# Altium PCB PCB1.PcbDoc
Units mil, origin at the board's own origin, x right, y up, seen from the top; angles counter-clockwise.
Board outline 2800 x 4400 mil, 2 copper layers (Top Layer, Bottom Layer); 74 components, 69 nets, 258 pads, 0 vias.
Unrouted connection lines stored in the file: 176.
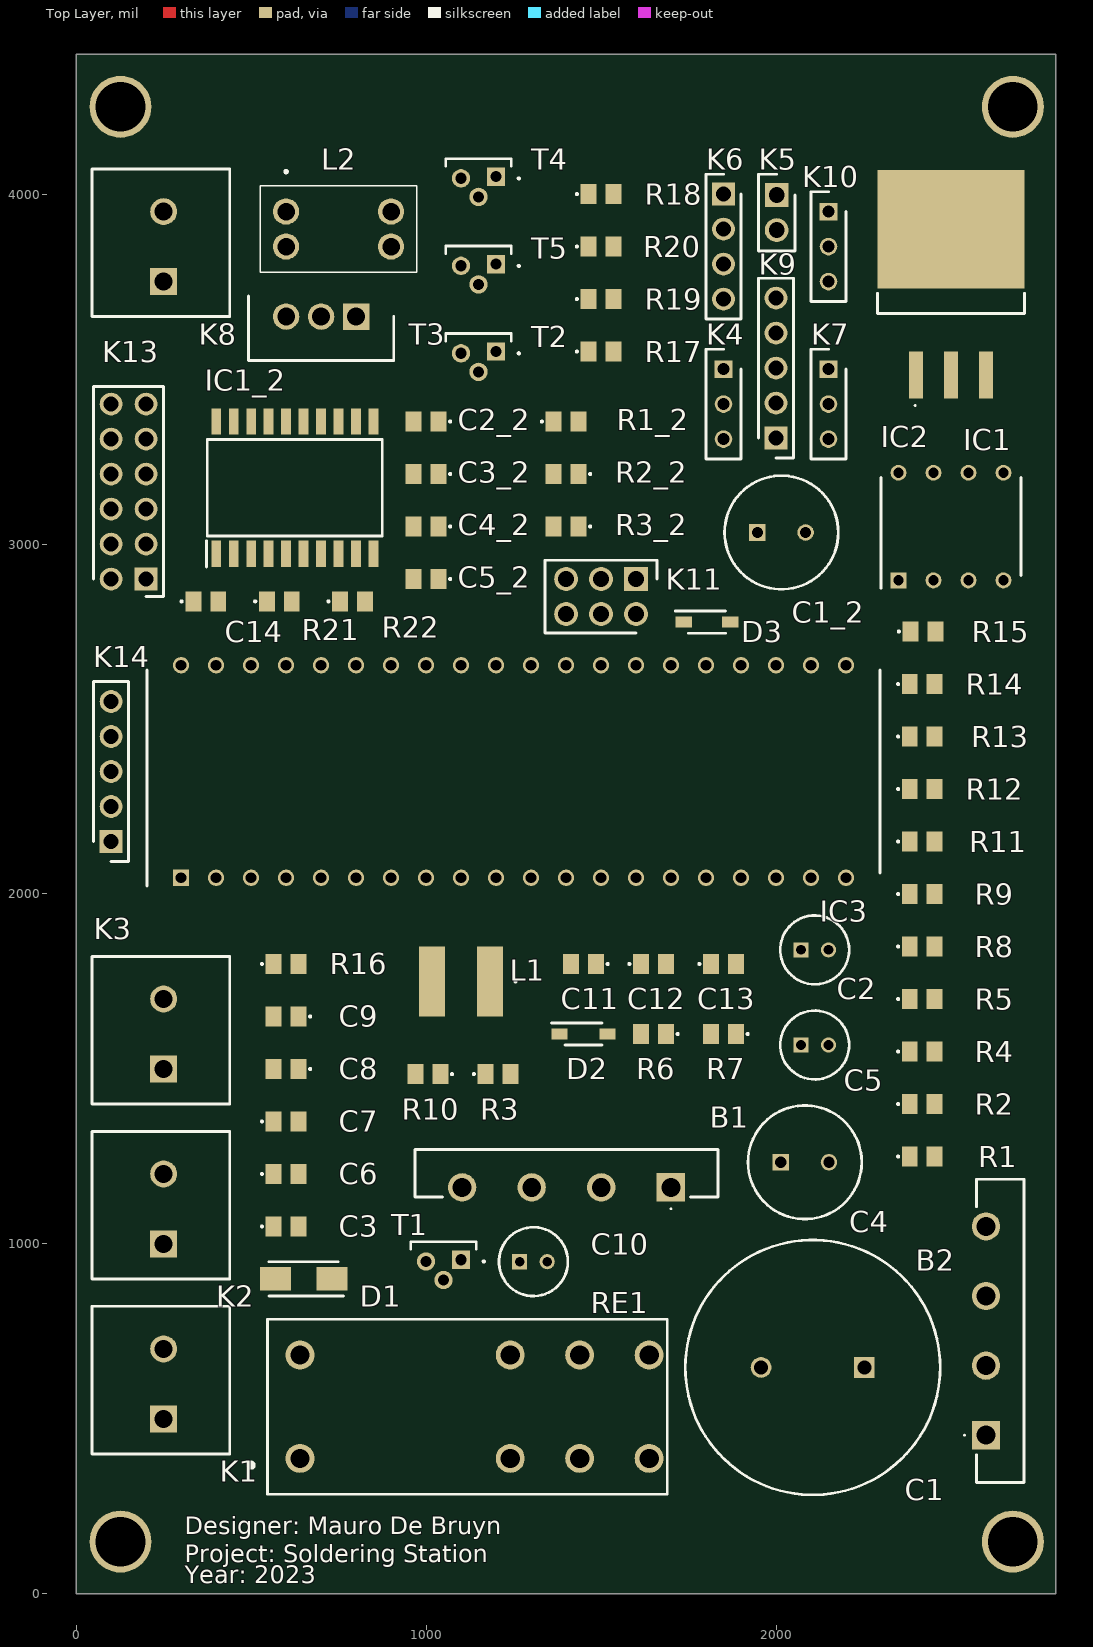
[diagram p0: Top Layer view]
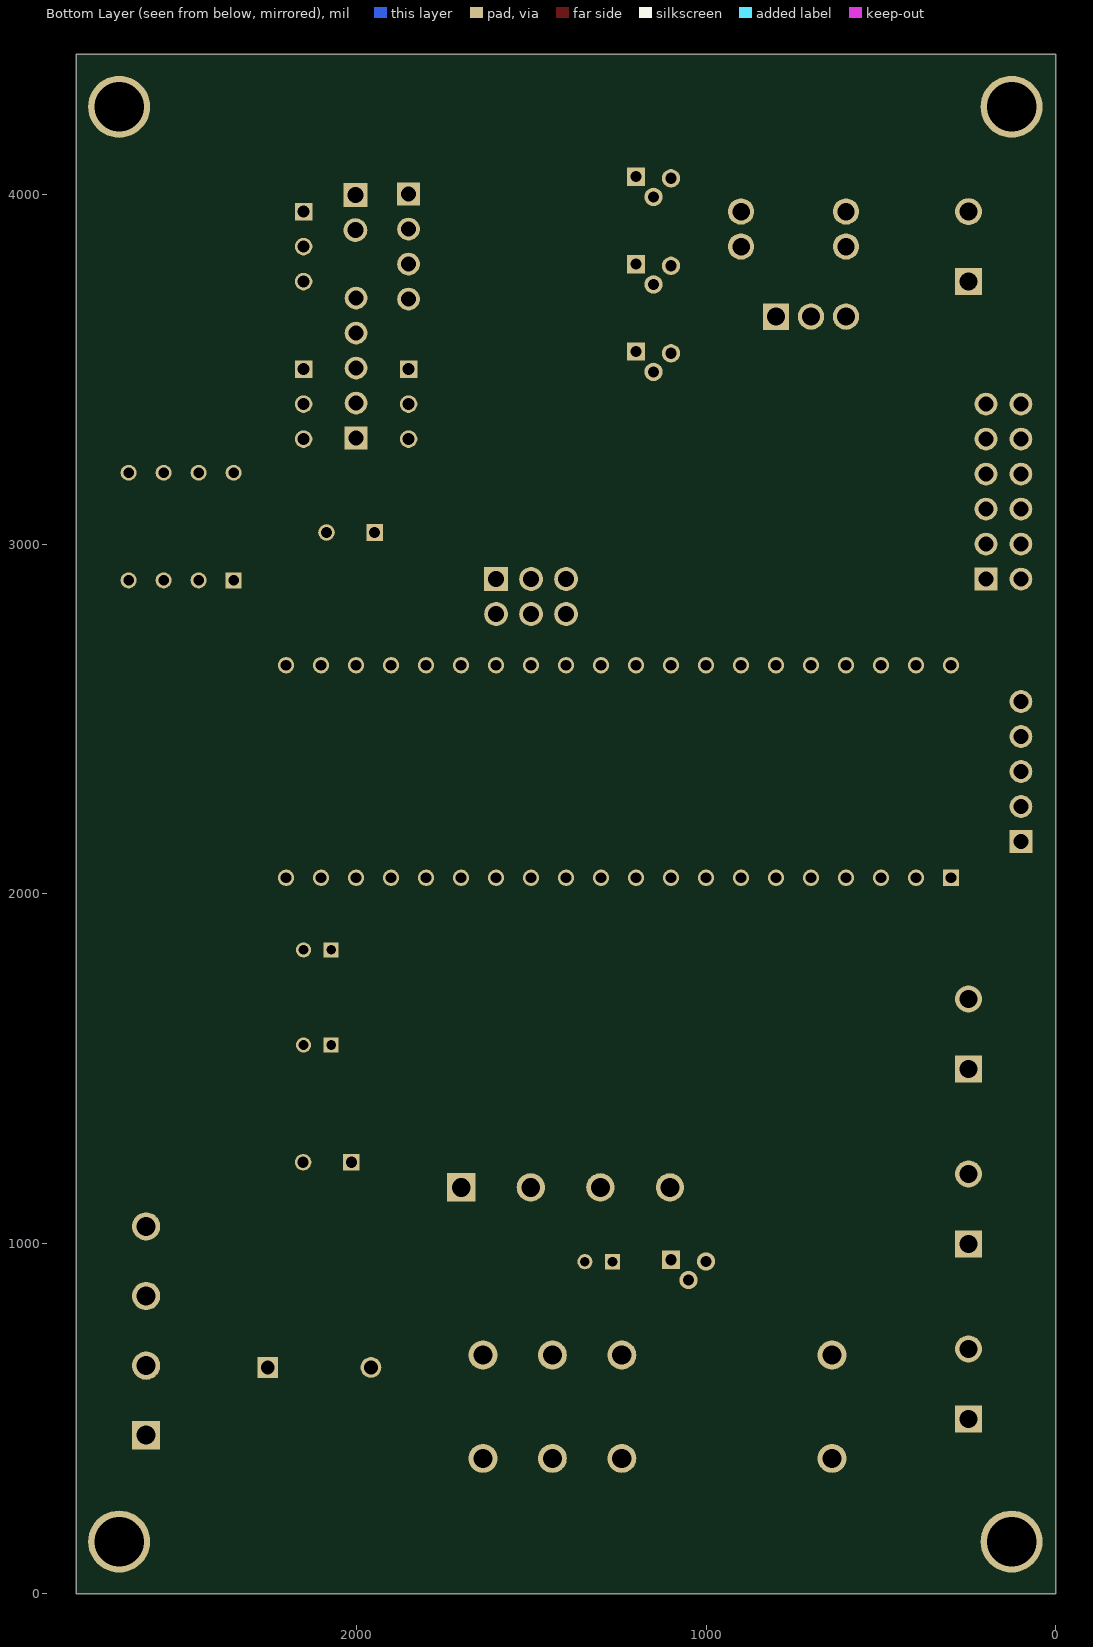
[diagram p1: Bottom Layer view, seen from below]

## Layer stack, top to bottom
Top Solder: solder mask 0.4, Solder Resist, Dk 3.5
Top Layer: signal copper 1.4
Dielectric 1: dielectric 12.6, FR-4, Dk 4.8
Bottom Layer: signal copper 1.4
Bottom Solder: solder mask 0.4, Solder Resist, Dk 3.5

## Board outline
0,4400 0,0 2800,0 2800,4400

## Design rules (kind name [scope] priority, off if disabled: settings)
Clearance [All] p1: gap=10 ignorepadtopadclearanceinfootprint=FALSE except(0: Arc-Hole Track-Hole SMDPad-Hole THPad-Hole Via-Hole Fill-Hole Poly-Hole Region-Hole Text-Hole)
PolygonConnect [All] p1: connectstyle=Relief reliefconductorwidth=10 reliefentries=4 polygonreliefangle="90 Angle" airgapwidth=10
RoutingVias [All] p1: holewidth=28 width=50 viastyle="Through Hole" minholewidth=28 minwidth=50 maxholewidth=28 maxwidth=50
SolderMaskExpansion [All] p1: expansion=4 istentingtop=FALSE
Width [All] p1: maxlimit=10 minlimit=10 preferedwidth=10
30 further rules are at their usual default settings.

## Classes and differential pairs
component class Transistor: K8 L2 R17 R18 R19 R20 T2 T3 T4 T5
component class "Soldering Tip (Opam)": C2 C3 C6 C7 C12 C13 IC2 K3 R1 R2 R4 R5 R8 R9 R11 R12 R13 R14 R15
component class "Power (Bridge Rectifier)": B1 B2 C1 C4 C5 D1 D2 IC1 K1 K2 R3 R6 R7 R10 RE1 T1
component class Display: C1_2 C2_2 C3_2 C4_2 C5_2 IC1_2 K13 K14 R1_2 R2_2 R3_2
component class CPU: C8 C9 C10 C11 C14 D3 IC3 K4 K5 K6 K7 K9 K10 K11 L1 R16 R21 R22

## Components (designator, comment, footprint, x,y, rotation, side; value= is the part's Value field where it differs from the comment)
B1 "GBU606-G" GBU606G 1699.5,1161.62 r0 top
B2 "GBU606-G" GBU606G 2600,453.54 r270 top
C1 "4700µF" CAPPRD750W80D1850H4150 2252.61,647.14 r180 top
C1_2 "100µF" CAPPRD350W60D825H1300 1946.68,3032.99 r0 top
C2 "10µF" CAPPRD200W52D500H1250 2071.26,1840.38 r0 top
C2_2 "100n" 0805 1000,3350 r180 top
C3 "100n" 0805 600,1050 r0 top
C3_2 "10n" 0805 1000,3200 r180 top
C4 "100µF" CAPPRD350W60D825H1300 2013.58,1233.43 r0 top
C4_2 "10n" 0805 1000,3050 r180 top
C5 "10µF" CAPPRD200W52D500H1250 2071.26,1568.43 r0 top
C5_2 "10n" 0805 1000,2900 r180 top
C6 "10n" 0805 600,1200 r0 top
C7 "10n" 0805 600,1350 r0 top
C8 "100n" 0805 600,1500 r180 top
C9 "100n" 0805 600,1650 r180 top
C10 "10µF" CAPPRD200W52D500H1250 1267.42,949.29 r0 top
C11 "100n" 0805 1450,1800 r180 top
C12 "10n" 0805 1650,1800 r0 top
C13 "10n" 0805 1850,1800 r0 top
C14 "100n" 0805 370.58,2836.32 r0 top
D1 "FM4007W-W" DIOM5025X231N 650,900 r180 top
D2 "SZMMSZ5231BT1G" SOD3716X135N 1450,1600 r0 top
D3 "MMSD4448" SOD3816X128N 1802.68,2776.86 r0 top
IC1 "TL780-05CKTTR" TL78005CKTTR 2500,3748.23 r0 top
IC1_2 "TM1637" tm1637 625,3161.02 r90 top
IC2 "MCP6002-E_P" DIP781W56P254L950H533Q8N 2500,3050 r90 top
IC3 "ATMEGA4809-PF" DIP1543W58P254L5175H635Q40N 1250,2350 r90 top
K1 "2 Pin Connector 1716020000" 1716020000 250,500 r90 top
K2 "2 Pin Connector 1716020000" 1716020000 250,1000 r90 top
K3 "2 Pin Connector 1716020000" 1716020000 250,1500 r90 top
K4 "M20-9990345" HDRV3W64P0X254_1X3_762X254X864P 1850,3500 r270 top
K5 "M20-9990246" HDRV2W66P0X254_1X2_508X254X874P 2001.97,3997.05 r270 top
K6 "UART2" HDRV4W64P0X254_1X4_1016X254X834P 1850,4000 r270 top
K7 "M20-9990345" HDRV3W64P0X254_1X3_762X254X864P 2150,3500 r270 top
K8 "2 Pin Connector 1716020000" 1716020000 250,3750 r90 top
K9 "M20-9990545" HDRV5W64P0X254_1X5_1270X254X864P 2000,3302.76 r90 top
K10 "UART0" HDRV3W64P0X254_1X3_762X254X864P 2150,3950 r270 top
K11 "M20-9760342" HDRV6W66P254_2X3_762X508X830P 1600,2900 r180 top
K13 "Display" HDRV12W64P254_2X6_1524X508X909P 200,2900 r90 top
K14 "Encorder" HDRV5W64P0X254_1X5_1270X254X864P 100,2150 r90 top
L1 "10μH" VLS6045 1100,1750 r180 top
L2 "100MH" CM2545X171B10 600,3950 r270 top
R1 "18K" 0805 2417.74,1249.84 r0 top
R1_2 "10K" 0805 1400,3350 r0 top
R2 "1M" 0805 2417.74,1399.84 r0 top
R2_2 "10K" 0805 1400,3200 r180 top
R3 "68K" 0805 1205.51,1485.18 r0 top
R3_2 "10K" 0805 1400,3050 r180 top
R4 "5K6" 0805 2417.74,1549.84 r0 top
R5 "5K6" 0805 2417.74,1699.84 r0 top
R6 "10K" 0805 1650,1600 r180 top
R7 "10K" 0805 1850,1600 r180 top
R8 "100E" 0805 2417.74,1849.84 r0 top
R9 "10M" 0805 2417.74,1999.84 r0 top
R10 "4K7" 0805 1005.51,1485.18 r180 top
R11 "18K" 0805 2417.74,2149.84 r0 top
R12 "18K" 0805 2417.74,2299.84 r0 top
R13 "5K6" 0805 2417.74,2449.84 r0 top
R14 "5K6" 0805 2417.74,2599.84 r0 top
R15 "100E" 0805 2420,2750 r0 top
R16 "4K7" 0805 600,1800 r0 top
R17 "4k7" 0805 1500,3550 r0 top
R18 "100E" 0805 1500,4000 r0 top
R19 "10K" 0805 1500,3700 r0 top
R20 "4k7" 0805 1500,3850 r0 top
R21 "4K7" 0805 580.66,2836.32 r0 top
R22 "4K7" 0805 789.89,2836.32 r0 top
RE1 "RT424005" RT42 639.75,534.84 r0 top
T1 "BC547CBU" BC547CBU 1100,950 r180 top
T2 "BC547CBU" BC547CBU 1200,3545 r180 top
T3 "IRF9Z34NPBF" TO254P469X1042X1967-3P 800,3650 r180 top
T4 "BC547CBU" BC547CBU 1200,4045 r180 top
T5 "BC557" BC547CBU 1200,3795 r180 top

## Footprints (in the part's own frame and the unit in brackets; to place one, negate y for a bottom-side part, rotate by r counter-clockwise, add the part's x,y. Pads: shape width x height; smd on the part's side, far side on the other; paste and mask are expansions set on the pad)
0805 [mm]
  rect 1.15x1.45 smd: 1(-0.9,0) 2(0.9,0)
  silkscreen extent -1.8,-0.05 -1.7,0.05, body extent -1.14,-0.66 1.16,0.89, height 0.98
1716020000 [mm]
  rect 1.95x1.95 hole 1.3: 1(0,0)
  round 1.95 hole 1.3: 2(5.08,0)
  silkscreen extent -2.54,-4.8 8.17,5.2, body extent -2.54,-4.8 8.17,5.2, height 13.8
BC547CBU [mm]
  rect 1.333x1.333 hole 0.82: 1(0,-0.127)
  round 1.333 hole 0.82: 2(1.27,1.35) 3(2.54,0)
  silkscreen extent -1.7,-1.43 3.65,0.05, body extent -1.11,-1.43 3.65,2.19, height 5.43
CAPPRD200W52D500H1250 [mm]
  rect 1.1x1.1 hole 0.7: 1(0,0)
  round 1.1 hole 0.7: 2(2,0)
  silkscreen extent -1.5,-2.5 3.5,2.5, body extent -1.75,-2.75 3.75,2.75, height 12.5
CAPPRD350W60D825H1300 [mm]
  rect 1.2x1.2 hole 0.8: 1(0,0)
  round 1.2 hole 0.8: 2(3.5,0)
  silkscreen extent -2.38,-4.12 5.87,4.12, body extent -2.5,-4.25 6,4.25, height 13
CAPPRD750W80D1850H4150 [mm]
  rect 1.5x1.5 hole 1: 1(0,0)
  round 1.5 hole 1: 2(7.5,0)
  silkscreen extent -5.5,-9.25 13,9.25, body extent -5.5,-9.25 13,9.25, height 41.5
CM2545X171B10 [mil]
  round 75 hole 50: 1(0,0) 2(100,0) 3(100,300) 4(0,300)
  silkscreen extent -118,-74 174,374, body extent -74,-74 174,374, height 378
DIOM5025X231N [mm]
  rect 2.25x1.7 smd: 1(-2.05,0) 2(2.05,0)
  silkscreen extent -2.9,-1.24 2.5,1.24, body extent -2.5,-1.24 2.5,1.24, height 2.31
DIP781W56P254L950H533Q8N [mm]
  rect 1.158x1.158 hole 0.758: 1(-3.905,3.81)
  round 1.158 hole 0.758: 2(-3.905,1.27) 3(-3.905,-1.27) 4(-3.905,-3.81) 5(3.905,-3.81) 6(3.905,-1.27) 7(3.905,1.27) 8(3.905,3.81)
  silkscreen extent -4.48,-5.08 3.56,5.08, body extent -4.04,-4.75 4.04,4.75, height 5.33
DIP1543W58P254L5175H635Q40N [mm]
  rect 1.184x1.184 hole 0.784: 1(-7.715,24.13)
  round 1.184 hole 0.784: 2(-7.715,21.59) 3(-7.715,19.05) 4(-7.715,16.51) 5(-7.715,13.97) 6(-7.715,11.43) 7(-7.715,8.89) 8(-7.715,6.35) 9(-7.715,3.81) 10(-7.715,1.27) 11(-7.715,-1.27) 12(-7.715,-3.81) 13(-7.715,-6.35) 14(-7.715,-8.89) 15(-7.715,-11.43) 16(-7.715,-13.97) 17(-7.715,-16.51) 18(-7.715,-19.05) 19(-7.715,-21.59) 20(-7.715,-24.13) 21(7.715,-24.13) 22(7.715,-21.59) 23(7.715,-19.05) 24(7.715,-16.51) 25(7.715,-13.97) 26(7.715,-11.43) 27(7.715,-8.89) 28(7.715,-6.35) 29(7.715,-3.81) 30(7.715,-1.27) 31(7.715,1.27) 32(7.715,3.81) 33(7.715,6.35) 34(7.715,8.89) 35(7.715,11.43) 36(7.715,13.97) 37(7.715,16.51) 38(7.715,19.05) 39(7.715,21.59) 40(7.715,24.13)
  silkscreen extent -8.31,-26.61 7.37,26.61, body extent -7.86,-25.88 7.86,25.88, height 6.35
GBU606G [mm]
  rect 2.055x2.055 hole 1.37: 1(0,0)
  round 2.055 hole 1.37: 2(-5.05,0) 3(-10.1,0) 4(-15.15,0)
  silkscreen extent -18.57,-1.6 3.43,2.75, body extent -18.57,-0.69 3.43,2.76, height 21.05
HDRV2W66P0X254_1X2_508X254X874P [mm]
  rect 1.725x1.725 hole 1.15: 1(0,0)
  round 1.725 hole 1.15: 2(2.54,0)
  silkscreen extent -1.52,-1.32 4.06,1.32, body extent -1.27,-1.27 3.81,1.27, height 8.74
HDRV3W64P0X254_1X3_762X254X864P [mm]
  rect 1.275x1.275 hole 0.85: 1(0,0)
  round 1.275 hole 0.85: 2(2.54,0) 3(5.08,0)
  silkscreen extent -1.45,-1.27 6.53,1.27, body extent -1.27,-1.27 6.35,1.27, height 8.64
HDRV4W64P0X254_1X4_1016X254X834P [mm]
  rect 1.65x1.65 hole 1.1: 1(0,0)
  round 1.65 hole 1.1: 2(2.54,0) 3(5.08,0) 4(7.62,0)
  silkscreen extent -1.45,-1.27 9.07,1.27, body extent -1.27,-1.27 8.89,1.27, height 8.34
HDRV5W64P0X254_1X5_1270X254X864P [mm]
  rect 1.65x1.65 hole 1.1: 1(0,0)
  round 1.65 hole 1.1: 2(2.54,0) 3(5.08,0) 4(7.62,0) 5(10.16,0)
  silkscreen extent -1.44,-1.27 11.61,1.27, body extent -1.27,-1.27 11.43,1.27, height 8.64
HDRV6W66P254_2X3_762X508X830P [mm]
  rect 1.725x1.725 hole 1.15: 1(0,0)
  round 1.725 hole 1.15: 2(0,2.54) 3(2.54,0) 4(2.54,2.54) 5(5.08,0) 6(5.08,2.54)
  silkscreen extent -1.52,-1.37 6.6,3.91, body extent -1.27,-1.27 6.35,3.81, height 8.38
HDRV12W64P254_2X6_1524X508X909P [mm]
  rect 1.65x1.65 hole 1.1: 1(0,0)
  round 1.65 hole 1.1: 2(0,2.54) 3(2.54,0) 4(2.54,2.54) 5(5.08,0) 6(5.08,2.54) 7(7.62,0) 8(7.62,2.54) 9(10.16,0) 10(10.16,2.54) 11(12.7,0) 12(12.7,2.54)
  silkscreen extent -1.27,-1.27 13.97,3.81, body extent -1.27,-1.27 13.97,3.81, height 9.09
RT42 [mm]
  round 2.1 hole 1.4: 1(0,-3.75) 2(15.26,-3.75) 3(20.3,-3.75) 4(25.34,-3.75) 5(25.34,3.75) 6(20.3,3.75) 7(15.26,3.75) 8(0,3.75)
  silkscreen extent -3.67,-6.35 26.65,6.35, body extent -2.21,-6.35 26.79,6.35, height 15.86
SOD3716X135N [mm]
  rect 1.15x0.8 smd: 1(-1.75,0) 2(1.75,0)
  silkscreen extent -2.33,-0.8 1.34,0.8, body extent -1.86,-0.8 1.86,0.8, height 1.35
SOD3816X128N [mm]
  rect 1.2x0.8 smd: 1(-1.7,0) 2(1.7,0)
  silkscreen extent -2.3,-0.8 1.35,0.8, body extent -1.88,-0.8 1.88,0.8, height 1.28
TL78005CKTTR [mm]
  rect 1x3.4 smd: 1(-2.54,-6.745) 2(0,-6.745) 3(2.54,-6.745)
  rect 10.7x8.6 smd: 4(0,3.855)
  silkscreen extent -5.33,-9 5.33,-0.8
tm1637 [mm]
  rect 1.9x0.7 smd: 1(-4.8,5.715) 2(-4.8,4.445) 3(-4.8,3.175) 4(-4.8,1.905) 5(-4.8,0.635) 6(-4.8,-0.635) 7(-4.8,-1.905) 8(-4.8,-3.175) 9(-4.8,-4.445) 10(-4.8,-5.715) 11(4.8,-5.715) 12(4.8,-4.445) 13(4.8,-3.175) 14(4.8,-1.905) 15(4.8,-0.635) 16(4.8,0.635) 17(4.8,1.905) 18(4.8,3.175) 19(4.8,4.445) 20(4.8,5.715)
  silkscreen extent -5.75,-6.35 3.5,6.42, body extent -5.23,-6.35 5.23,6.35, height 2.8
TO254P469X1042X1967-3P [mm]
  rect 1.92x1.92 hole 1.28: 1(0,0)
  round 1.92 hole 1.28: 2(2.54,0) 3(5.08,0)
  silkscreen extent -2.73,-1.49 7.81,3.2, body extent -2.67,-1.5 7.75,3.19, height 18.84
VLS6045 [mm]
  rect 1.9x5.1 smd: 1(-2.1,0) 2(2.1,0)
  silkscreen extent -4,-0.05 -3.9,0.05, body extent -3.15,-3 3.15,3, height 4.5

## Part data
B1 B2: "Bridge Rectifier", Manufacturer_Name="Comchip Technology", Datasheet Link=https://www.comchiptech.com/product.php?id=2217, Height=20.95mm, Manufacturer_Part_Number=GBU606-G
C1: library part 50PK4700MEFC18X40, "Capacitor Polarised", Manufacturer_Name=Rubycon, Mouser2 Part Number=232-50PK4700MEFC18X4, Datasheet Link=https://componentsearchengine.com//50PK4700MEFC18X40.pdf, Height=41.5mm, Manufacturer_Part_Number=50PK4700MEFC18X40, Mouser2 Price/Stock=https://www.mouser.com/Search/Refine.aspx?Keyword=232-50PK4700MEFC18X4
C1_2 C4: library part RGA101M1HBK-0811G, "Capacitor Polarised", Manufacturer_Name=Lelon, Datasheet Link=https://www.arrow.com/en/products/rga101m1hbk-0811g/lelon-electronics, Height=13mm, Manufacturer_Part_Number=RGA101M1HBK-0811G
C2 C5 C10: library part 860020672010, "Capacitor Polarised", Manufacturer_Name="Wurth Elektronik", Mouser2 Part Number=710-860020672010, Datasheet Link=https://componentsearchengine.com//860020672010.pdf, Height=12.5mm, Manufacturer_Part_Number=860020672010, Mouser2 Price/Stock=https://www.mouser.com/Search/Refine.aspx?Keyword=710-860020672010
C2_2 C3 C3_2 C4_2 C5_2 C6 C7 C8 C9 C11 C12 C13 C14: library part "0805 (Capacitor)", "Capacitor", Manufacturer_Name=Kemet, Manufacturer_Part_Number=C0805C391G3GACTU, Datasheet Link=https://content.kemet.com/datasheets/KEM_C1003_C0G_SMD.pdf, Height=1.1mm
D1: "Bridge Rectifier", Manufacturer_Name=Rectron, Mouser2 Part Number=583-FM4007W-W, Datasheet Link=https://componentsearchengine.com//FM4007W-W.pdf, Height=2.31mm, Manufacturer_Part_Number=FM4007W-W, Mouser2 Price/Stock=https://www.mouser.com/Search/Refine.aspx?Keyword=583-FM4007W-W
D2: "Zener Diode", Manufacturer_Name=onsemi, Mouser Part Number=863-SZMMSZ5231BT1G, Arrow Part Number=SZMMSZ5231BT1G, Arrow Price/Stock=https://www.arrow.com/en/products/szmmsz5231bt1g/on-semiconductor?region=nac, Datasheet Link=https://www.onsemi.com/pdf/datasheet/mmsz5221bt1-d.pdf, Height=1.35mm, Manufacturer_Part_Number=SZMMSZ5231BT1G, Mouser Price/Stock=https://www.mouser.co.uk/ProductDetail/onsemi/SZMMSZ5231BT1G?qs=tYFd4l%252BlHeQgPMc6zsX19w%3D%3D
D3: "Diode", Manufacturer_Name=onsemi, Mouser Part Number=512-MMSD4448, Arrow Part Number=MMSD4448, Arrow Price/Stock=https://www.arrow.com/en/products/mmsd4448/on-semiconductor?region=nac, Datasheet Link=https://datasheet.datasheetarchive.com/originals/distributors/Datasheets_SAMA/ce1b7d7eb81c2fed950cf88eaf7986e9.pdf, Height=1.28mm, Manufacturer_Part_Number=MMSD4448, Mouser Price/Stock=https://www.mouser.co.uk/ProductDetail/onsemi-Fairchild/MMSD4448?qs=HxNY1oXTrTS1XYzDYVbdxA%3D%3D
IC1: "Integrated Circuit", Manufacturer_Name="Texas Instruments", Datasheet Link=http://www.ti.com/general/docs/suppproductinfo.tsp?distId=26&gotoUrl=http%3A%2F%2Fwww.ti.com%2Flit%2Fgpn%2Ftl780, Height=5.08mm, Manufacturer_Part_Number=TL780-05CKTTR
IC1_2: library part TM1637__SOP_, "Integrated Circuit", Manufacturer_Name="TITAN MICRO ELECTRONICS", Manufacturer_Part_Number="TM1637 (SOP)", Datasheet Link=https://www.mcielectronics.cl/website_MCI/static/documents/Datasheet_TM1637.pdf, Height=2.8mm
IC2: "Integrated Circuit", Manufacturer_Name=Microchip, Manufacturer_Part_Number=MCP6002-E/P, Mouser2 Part Number=579-MCP6002-E/P, Datasheet Link=https://componentsearchengine.com//MCP6002-E_P.pdf, Height=5.334mm, Mouser2 Price/Stock=https://www.mouser.com/Search/Refine.aspx?Keyword=579-MCP6002-E%2FP
IC3: "Integrated Circuit", Manufacturer_Name=Microchip, Mouser2 Part Number=556-ATMEGA4809-PF, Datasheet Link=https://componentsearchengine.com//ATMEGA4809-PF.pdf, Height=6.35mm, Manufacturer_Part_Number=ATMEGA4809-PF, Mouser2 Price/Stock=https://www.mouser.com/Search/Refine.aspx?Keyword=556-ATMEGA4809-PF
K1 K2 K3 K8: "Connector", Manufacturer_Name=Weidmuller, Manufacturer_Part_Number=1716020000, Datasheet Link=https://catalog.weidmueller.com/catalog/Start.do?ObjectID=1716020000&_ga=2.21797499.1716783809.1613378202-511725545.1613378202
K4 K7: "Connector 3-PIN", Manufacturer_Name=Harwin, Mouser2 Part Number=855-M20-9990345, Datasheet Link=https://componentsearchengine.com//M20-9990345.pdf, Height=8.64mm, Manufacturer_Part_Number=M20-9990345, Mouser2 Price/Stock=https://www.mouser.com/Search/Refine.aspx?Keyword=855-M20-9990345
K5: "Connector 2-PIN", Manufacturer_Name=Harwin, Mouser2 Part Number=855-M20-9990246, Datasheet Link=https://componentsearchengine.com//M20-9990246.pdf, Height=8.74mm, Manufacturer_Part_Number=M20-9990246, Mouser2 Price/Stock=https://www.mouser.com/Search/Refine.aspx?Keyword=855-M20-9990246
K6: library part M20-9770446, "Connector 4-PIN", Manufacturer_Name=Harwin, Mouser2 Part Number=855-M20-9770446, Datasheet Link=https://componentsearchengine.com//M20-9770446.pdf, Height=8.34mm, Manufacturer_Part_Number=M20-9770446, Mouser2 Price/Stock=https://www.mouser.com/Search/Refine.aspx?Keyword=855-M20-9770446
K9: "Connector 5-PIN", Manufacturer_Name=Harwin, Mouser2 Part Number=855-M20-9990545, Datasheet Link=https://componentsearchengine.com//M20-9990545.pdf, Height=8.64mm, Manufacturer_Part_Number=M20-9990545, Mouser2 Price/Stock=https://www.mouser.com/Search/Refine.aspx?Keyword=855-M20-9990545
K10: library part M20-9990345, "Connector 3-PIN", Manufacturer_Name=Harwin, Mouser2 Part Number=855-M20-9990345, Datasheet Link=https://componentsearchengine.com//M20-9990345.pdf, Height=8.64mm, Manufacturer_Part_Number=M20-9990345, Mouser2 Price/Stock=https://www.mouser.com/Search/Refine.aspx?Keyword=855-M20-9990345
K11: "Connector 6-PIN", Manufacturer_Name=Harwin, Datasheet Link=https://cdn.harwin.com/pdfs/M20-976.pdf, Height=8.3mm, Manufacturer_Part_Number=M20-9760342
K13: library part 240-062, "Connector 12-PIN", Manufacturer_Name=Digilent, Datasheet Link=https://digilent.com/shop/2x6-pin-header-5-pack/, Height=9.09mm, Manufacturer_Part_Number=240-062
K14: library part M20-9990545, "Connector 5-PIN", Manufacturer_Name=Harwin, Mouser2 Part Number=855-M20-9990545, Datasheet Link=https://componentsearchengine.com//M20-9990545.pdf, Height=8.64mm, Manufacturer_Part_Number=M20-9990545, Mouser2 Price/Stock=https://www.mouser.com/Search/Refine.aspx?Keyword=855-M20-9990545
L1: library part VLS6045EX-100M-H, "Inductor", Manufacturer_Name=TDK, Mouser2 Part Number=810-VLS6045EX-100M-H, Datasheet Link=https://componentsearchengine.com//VLS6045EX-100M-H.pdf, Manufacturer_Part_Number=VLS6045EX-100M-H, Mouser2 Price/Stock=https://www.mouser.com/Search/Refine.aspx?Keyword=810-VLS6045EX-100M-H
L2: library part CM2545X171B-10, "Transformer", Manufacturer_Name="Laird Technologies", Datasheet Link=https://datasheet.datasheetarchive.com/originals/dk/DKDS-7/122753.pdf, Height=9.5mm, Manufacturer_Part_Number=CM2545X171B-10
R1 R1_2 R2 R2_2 R3 R3_2 R4 R5 R6 R7 R8 R9 R10 R11 R12 R13 R14 R15 R16 R17 R18 R19 R20 R21 R22: library part "0805 (Resistor)", "Resistor", Manufacturer_Name=Kemet, Manufacturer_Part_Number=C0805C391G3GACTU, Datasheet Link=https://content.kemet.com/datasheets/KEM_C1003_C0G_SMD.pdf, Height=1.1mm
RE1: "Relay or Contactor", Manufacturer_Name="TE Connectivity", Mouser2 Part Number=655-RT424005, Datasheet Link=https://componentsearchengine.com//RT424005.pdf, Manufacturer_Part_Number=RT424005, Mouser2 Price/Stock=https://www.mouser.com/Search/Refine.aspx?Keyword=655-RT424005
T1 T2 T4: "Transistor BJT NPN", Manufacturer_Name="ON Semiconductor", Datasheet Link=https://www.onsemi.com/pdf/datasheet/bc550-d.pdf, Height=5.33mm, Manufacturer_Part_Number=BC547CBU
T3: "MOSFET (P-Channel)", Manufacturer_Name=Infineon, Mouser2 Part Number=942-IRF9Z34NPBF, Datasheet Link=https://componentsearchengine.com//IRF9Z34NPBF.pdf, Height=4.69mm, Manufacturer_Part_Number=IRF9Z34NPBF, Mouser2 Price/Stock=https://www.mouser.com/Search/Refine.aspx?Keyword=942-IRF9Z34NPBF
T5: "Transistor BJT NPN", Manufacturer_Name="ON Semiconductor", Manufacturer_Part_Number=BC547CBU, Datasheet Link=https://www.onsemi.com/pdf/datasheet/bc550-d.pdf, Height=5.33mm

## Free pads (board coordinates)
  round 177.17 hole 141.73: "Mount 3"(126.85,149.53) "Mount 3"(126.85,4249.53) "Mount 3"(2676.85,149.53) "Mount 3"(2676.85,4249.53)

## Nets (pads, with @x,y where several pads share a name; then routed paths per layer and width w, separated by ;. In a path a pad name is that pad's centre, name@x,y a point inside that pad or via, vN(x,y) a via of type N, cw(c..) or ccw(c..) an arc to the next point about the centre after c; other vN are vias at no path point)
+5: C1_2.2 C2.2 C2_2.2 C3.2 C3_2.2 C4_2.2 C5.2 C5_2.2 C8.2 C9.2 C10.2 D1.1 D3.1 IC1.3 IC1_2.16 IC2.8 IC3.5 IC3.31 K6.1 K7.1 K11.2 L1.2 R1_2.2 R2.2 R2_2.2 R3_2.2 R16.2 R21.2 R22.2 RE1.1
GND: B1.4 B2.4 C1.1 C1_2.1 C2.1 C2_2.1 C3.1 C4.1 C5.1 C6.1 C7.1 C8.1 C9.1 C10.1 C11.1 C12.1 C13.1 D2.2 IC1.2 IC1.4 IC1_2.1 IC2.4 IC3.6 IC3.18 IC3.32 K3.1 K6.2 K7.3 K10.1 K11.6 K14.1 K14.4 L2.1 R6.1 R8.1 R9.1 R10.2 R15.1 R20.1 T1.3 T4.3 T5.3
NetB1_2: B1.2 K2.1 RE1.7
NetB1_3: B1.3 B2.2 K1.2 RE1.3
NetB2_1: B2.1 C4.2 IC1.1
NetB2_3: B2.3 K1.1 RE1.6
NetC3_2_1: C3_2.1 IC3.38 K14.5 R1_2.1
NetC4_2_1: C4_2.1 IC3.39 K14.3 R2_2.1
NetC5_2_1: C5_2.1 IC3.37 K14.2 R3_2.1
NetC6_2: C6.2 IC3.9 R5.1
NetC7_2: C7.2 IC2.5 R4.1
NetC11_2: C11.2 IC3.17 L1.1
NetC12_2: C12.2 IC3.10 R14.1
NetC13_2: C13.2 IC2.3 R13.1
NetC14_1: C14.1 K11.3
NetC14_2: C14.2 D3.2 IC3.29
NetD1_2: D1.2 RE1.8 T1.1
NetD2_1: D2.1 IC3.11 R3.1 R6.2
NetIC1_2_2: IC1_2.2 K13.1
NetIC1_2_3: IC1_2.3 K13.3
NetIC1_2_4: IC1_2.4 K13.5
NetIC1_2_5: IC1_2.5 K13.7
NetIC1_2_6: IC1_2.6 K13.9
NetIC1_2_7: IC1_2.7 K13.11
NetIC1_2_8: IC1_2.8 K13.2
NetIC1_2_9: IC1_2.9 K13.4
NetIC1_2_12: IC1_2.12 K13.12
NetIC1_2_13: IC1_2.13 K13.10
NetIC1_2_14: IC1_2.14 K13.8
NetIC1_2_15: IC1_2.15 K13.6
NetIC1_2_17: IC1_2.17 IC3.35 R22.1
NetIC1_2_18: IC1_2.18 IC3.36 R21.1
NetIC2_1: IC2.1 R11.1 R14.2
NetIC2_2: IC2.2 R12.1 R15.2
NetIC2_6: IC2.6 R1.2 R8.2
NetIC2_7: IC2.7 R1.1 R5.2
NetIC3_1: IC3.1 R19.1
NetIC3_2: IC3.2 K7.2 R16.1
NetIC3_7: IC3.7 K5.1
NetIC3_8: IC3.8 K5.2
NetIC3_12: IC3.12 K9.1
NetIC3_13: IC3.13 K9.2
NetIC3_14: IC3.14 K9.3
NetIC3_15: IC3.15 K9.4
NetIC3_16: IC3.16 K9.5
NetIC3_19: IC3.19 R7.2
NetIC3_20: IC3.20 K4.1
NetIC3_21: IC3.21 K4.2
NetIC3_22: IC3.22 K4.3
NetIC3_23: IC3.23 K6.4
NetIC3_24: IC3.24 K6.3
NetIC3_27: IC3.27 K11.1
NetIC3_28: IC3.28 K11.4
NetIC3_30: IC3.30 K11.5
NetIC3_33: IC3.33 K10.3
NetIC3_34: IC3.34 K10.2
NetK2_2: K2.2 RE1.2 RE1.5
NetK2_R: 
NetK3_2: K3.2 R2.1 R4.2 R9.2 R13.2
NetK8_1: K8.1 L2.3
NetK8_2: K8.2 L2.4
NetL2_2: L2.2 T3.2
NetR7_1: R7.1 R10.1 T1.2
NetR11_2: R11.2 R12.2
NetR17_1: R17.1 T2.2 T4.1 T5.2
NetR18_1: R18.1 T3.1
NetR18_2: R18.2 T2.3 T5.1
NetR19_2: R19.2 R20.2 T4.2
Vin: B1.1 C1.2 R3.2 R17.2 T2.1 T3.3
pads on no net: IC1_2.10 IC1_2.11 IC1_2.19 IC1_2.20 IC3.3 IC3.4 IC3.25 IC3.26 IC3.40 RE1.4

## Silkscreen, mask and mechanical layers (free items; w line width, h text height)
Top Overlay:
  text "Designer: Mauro De Bruyn" at 310,170 h50
  text "Project: Soldering Station" at 310,90 h50
  text "Year: 2023" at 310,30 h50
Mechanical 1:
  lines w10: 0,0 0,4400 2800,4400 2800,1600 2800,0 0,0